# EAGLE board Ex Controller 1 USB Device (EAGLE 7.6.0)

Size 27 x 28 mm. Coordinates in mm from the lower left corner, seen from the top.
Outline: 0,0 27,0 27,28 0,28 0,0
Copper layers (1*16): Top 0.035mm / dielectric 1.5mm / Bottom 0.035mm
Design rules "default": minimum track width 10mil, minimum drill 24mil, track to track 8mil, track to pad 8mil, pad to pad 8mil, via to via 8mil, smd to smd 8mil, copper to edge 40mil, drill to drill 8mil, minimum pad ring 10mil, minimum via ring 8mil, stop-mask expansion 4mil, vias tented up to drill 0mil, thermal gap 10mil

## Footprints (pad centres in the part's own frame; a part is rotated, then mirrored left to right if it is on the bottom)
1X10-BIG = drill 1.016 pad 1.778 octagon: 1 -11.43,0; 2 -8.89,0; 3 -6.35,0; 4 -3.81,0; 5 -1.27,0; 6 1.27,0; 7 3.81,0; 8 6.35,0; 9 8.89,0; 10 11.43,0
R0805 = smd 1.1 x 1.4: 1 -1,0; 2 1,0
1X03 = drill 1.016: 1 -2.54,0; 2 0,0; 3 2.54,0
USB-FEMALE-A-PTH = drill 0.9: D+ 5.9,1.3; D- 7.9,1.3; GND 3.4,1.3; VBUS 10.4,1.3 | drill 3: GND@1 13.5,4; GND@2 0.3,4

## Placement (x,y rotation side)
NUSBIO_IN  PINHD-1X10  [1X10-BIG]  13.5,1.5 180 top
NUSBIO_OUT  PINHD-1X10  [1X10-BIG]  13.5,26 180 top
R5  [R0805]  13.5,11 0 top
TRANS  [1X03]  13.5,19 0 top
USB_DEV_INPUT  USB  [USB-FEMALE-A-PTH]  20.2,21 270 top
USB_DEV_OUTPUT  USB  [USB-FEMALE-A-PTH]  6.8,7 90 top

## Library data of the parts
NUSBIO_IN NUSBIO_OUT R5 TRANS = adafruit
USB_DEV_INPUT USB_DEV_OUTPUT = STUNTAZ

## Nets
GND: NUSBIO_IN.10 NUSBIO_OUT.10
GPIO0: NUSBIO_IN.1 NUSBIO_OUT.1
GPIO1: NUSBIO_IN.2 NUSBIO_OUT.2
GPIO2: NUSBIO_IN.3 NUSBIO_OUT.3
GPIO3: NUSBIO_IN.4 NUSBIO_OUT.4
GPIO4: NUSBIO_IN.5 NUSBIO_OUT.5
GPIO5: NUSBIO_IN.6 NUSBIO_OUT.6 R5.1
GPIO6: NUSBIO_IN.7 NUSBIO_OUT.7
GPIO7: NUSBIO_IN.8 NUSBIO_OUT.8
T_GATE: R5.2 TRANS.1
USB_DMINUS: USB_DEV_INPUT.D- USB_DEV_OUTPUT.D-
USB_DPLUS: USB_DEV_INPUT.D+ USB_DEV_OUTPUT.D+
USB_GND: USB_DEV_INPUT.GND USB_DEV_OUTPUT.GND
USB_VCC_IN: TRANS.2 USB_DEV_INPUT.VBUS
USB_VCC_OUT: TRANS.3 USB_DEV_OUTPUT.VBUS
VCC: NUSBIO_IN.9 NUSBIO_OUT.9

## Tracks (layer width: path | path; a pad name or v marks a point on that pad's centre or on a via)
GND  (1 unrouted)
GPIO0  (1 unrouted)
GPIO1  (1 unrouted)
GPIO2  (1 unrouted)
GPIO3  (1 unrouted)
GPIO4  (1 unrouted)
GPIO5  (2 unrouted)
GPIO6  (1 unrouted)
GPIO7  (1 unrouted)
T_GATE  (1 unrouted)
USB_DMINUS  (1 unrouted)
USB_DPLUS  (1 unrouted)
USB_GND  (1 unrouted)
USB_VCC_IN  (1 unrouted)
USB_VCC_OUT  (1 unrouted)
VCC  (1 unrouted)

## Text on the board
tNames: GND | VCC | 7 | 6 | 5* | 4 | 3 | 2 | 1 | 0 | GATE | DRAIN | SOURCE | USB ON/OFF / Extension | USB ON/OFF / Extension | GND | VCC | 7 | 6 | 5 | 4 | 3 | 2 | 1 | 0
bNames: PCBv1 2017.3 | MadeInTheUSB.net